# Altium PCB PCB1.PcbDoc
Units mm, origin at the board's own origin, x right, y up, seen from the top; angles counter-clockwise.
Board outline 95.5 x 98.5 mm, 2 copper layers (Top Layer, Bottom Layer); 16 components, 20 nets, 80 pads, 4 vias.
Unrouted connection lines stored in the file: 1.
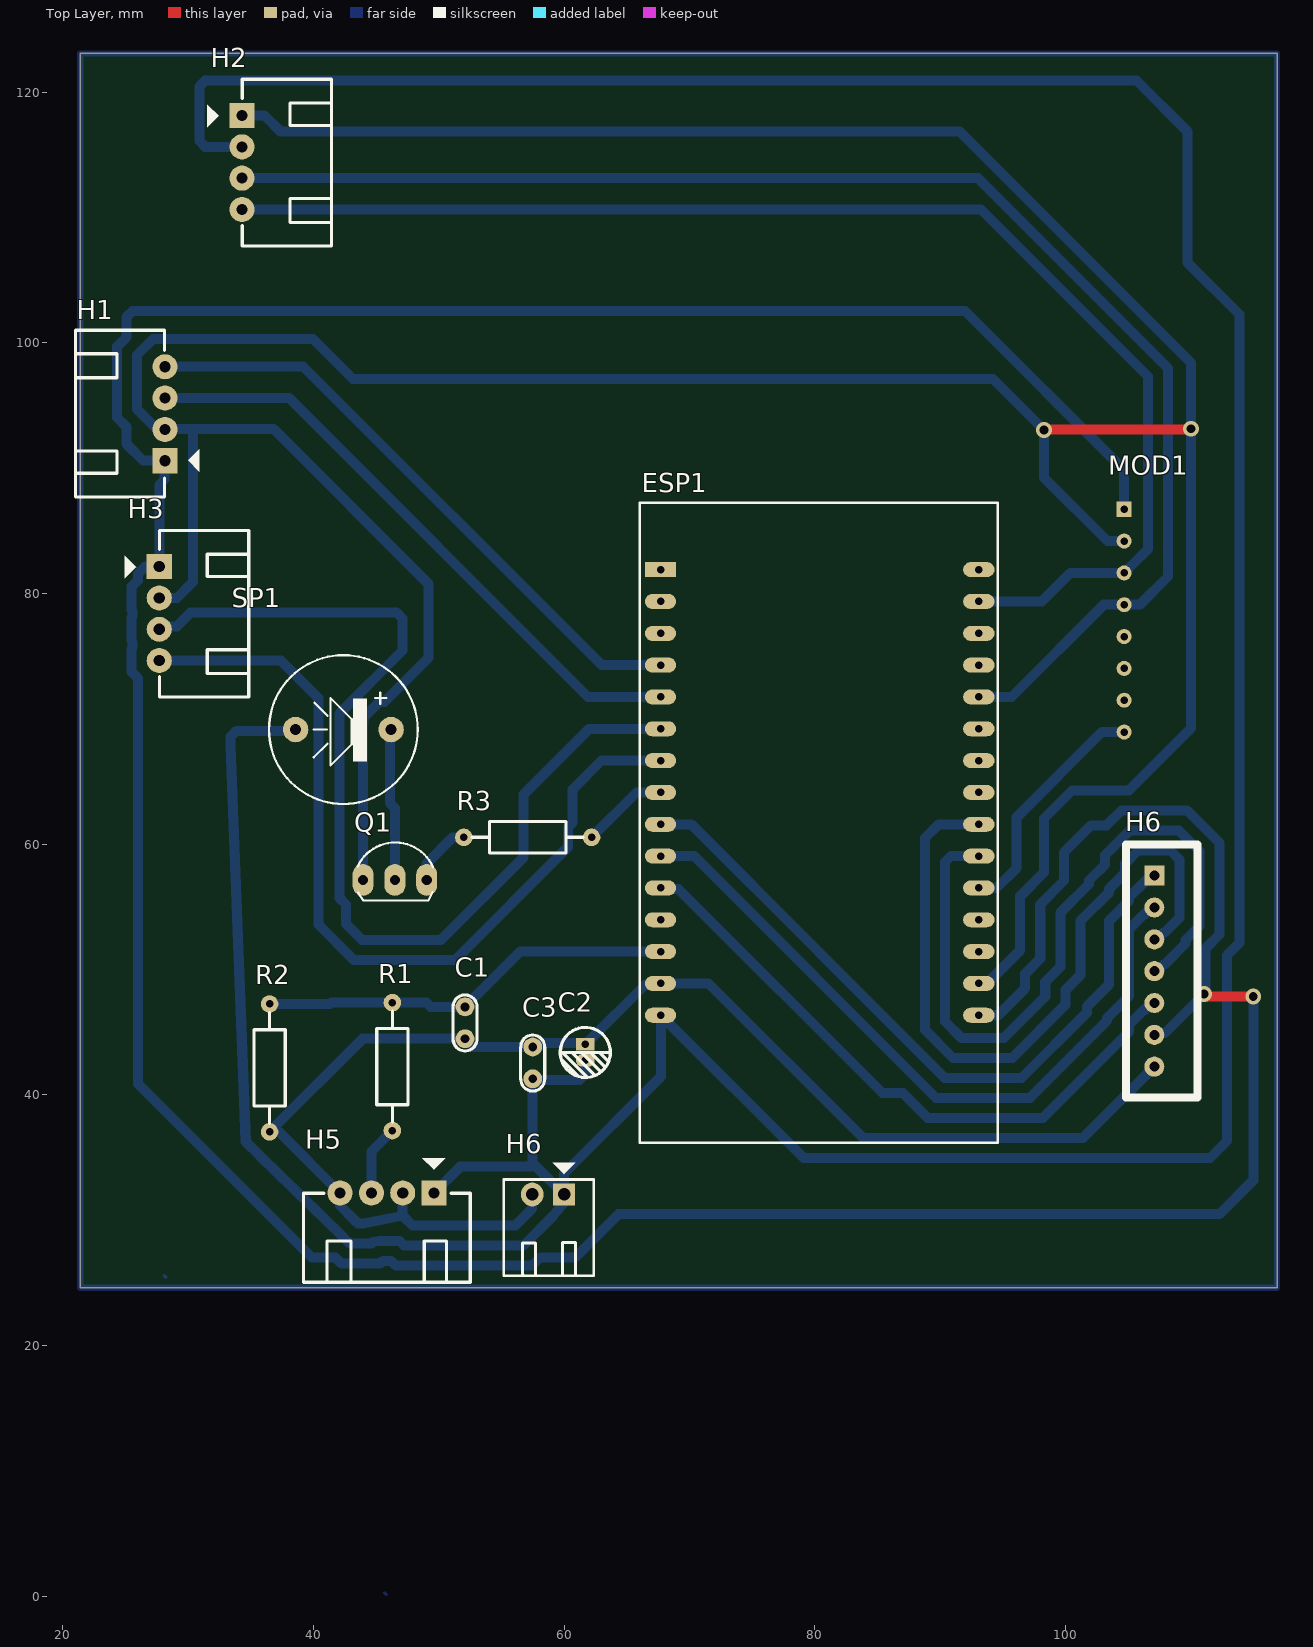
[diagram p0: Top Layer view]
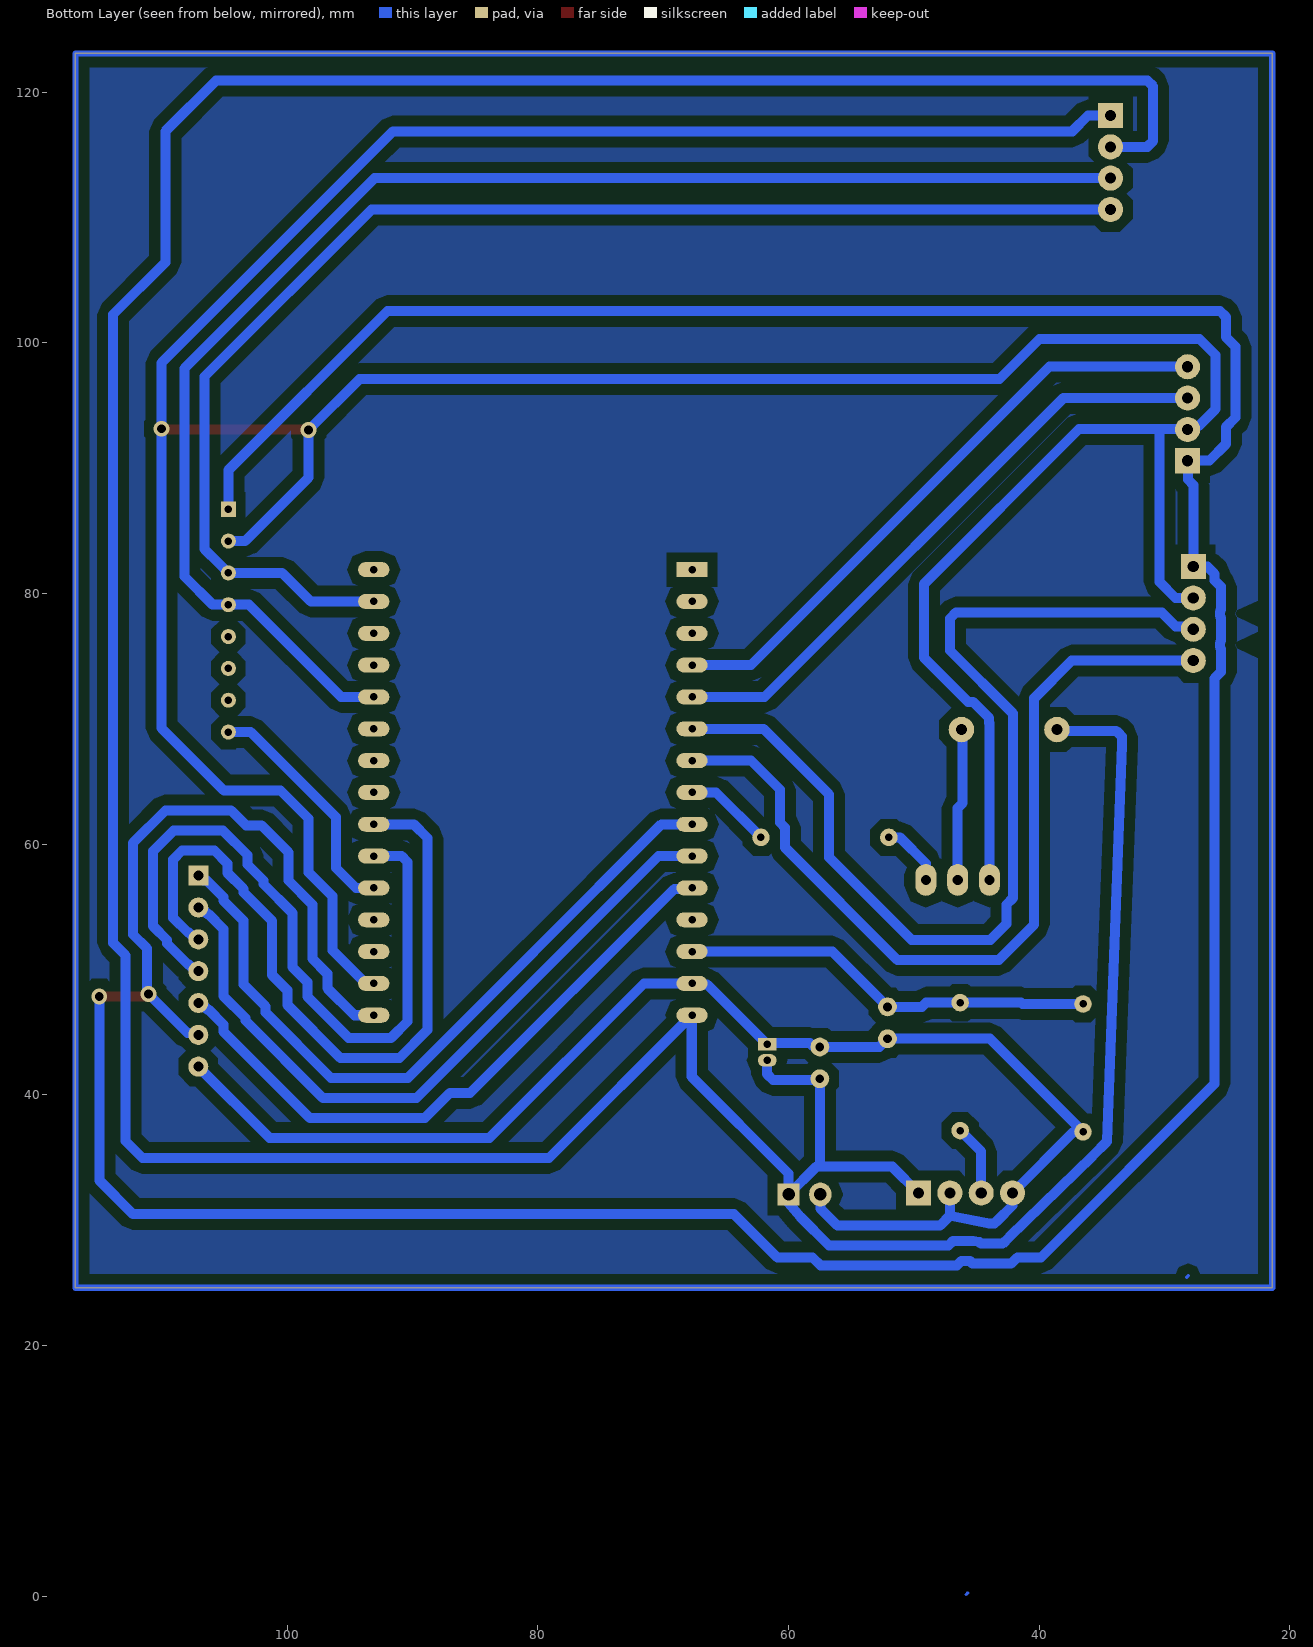
[diagram p1: Bottom Layer view, seen from below]
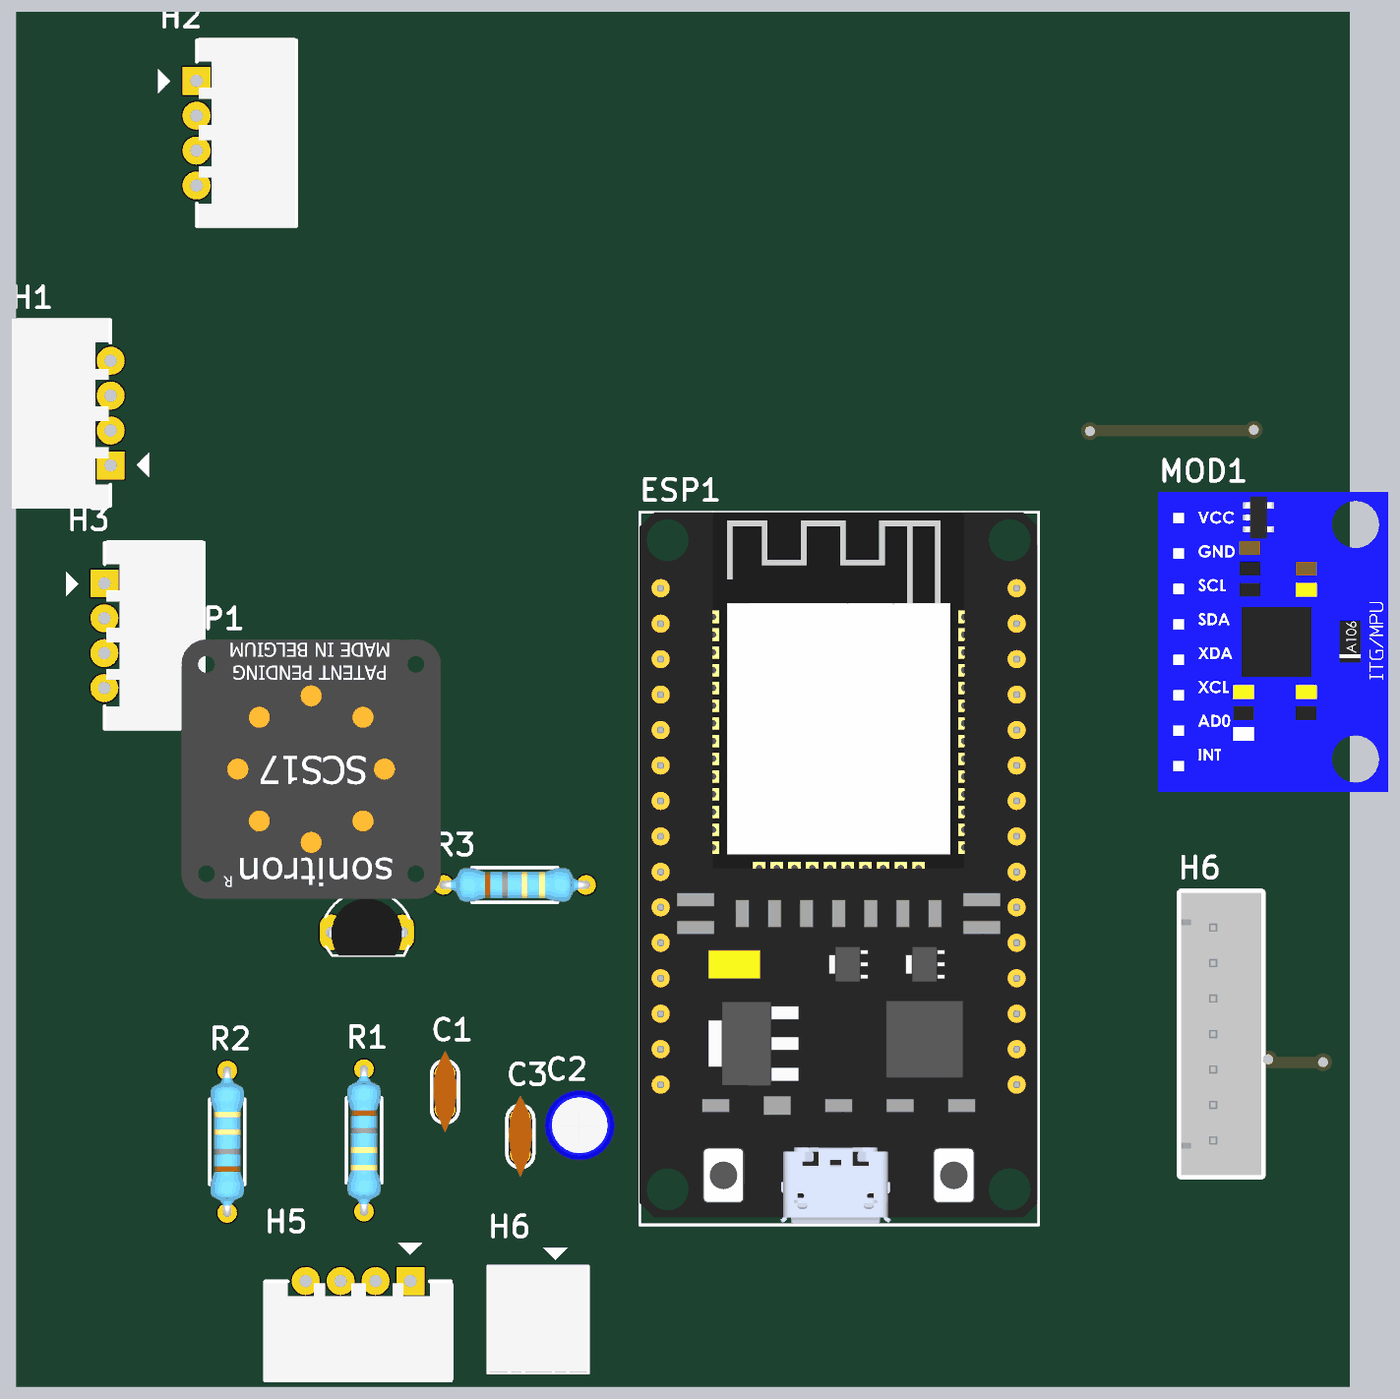
[diagram p2: 3D render of the assembled board from above, using the file's embedded part models]

## Layer stack, top to bottom
Top Solder: solder mask 0.0102, Solder Resist, Dk 3.5
Top Layer: signal copper 0.0356
Dielectric 1: dielectric 0.32, FR-4, Dk 4.8
Bottom Layer: signal copper 0.0356
Bottom Solder: solder mask 0.0102, Solder Resist, Dk 3.5

## Board outline
21.4,24.6 21.4,123.1 116.9,123.1 116.9,24.6

## Design rules (kind name [scope] priority, off if disabled: settings)
Clearance [All] p1: gap=0.8 ignorepadtopadclearanceinfootprint=FALSE
PolygonConnect [All] p1: connectstyle=Relief reliefconductorwidth=0.254 reliefentries=4 polygonreliefangle="90 Angle" airgapwidth=0.254
RoutingVias [All] p1: holewidth=0.711 width=1.27 viastyle="Through Hole" minholewidth=0.711 minwidth=1.27 maxholewidth=0.711 maxwidth=1.27
SolderMaskExpansion [All] p1: expansion=0.102 istentingtop=FALSE
Width [All] p1: maxlimit=1 minlimit=0.6 preferedwidth=0.8
30 further rules are at their usual default settings.

## Classes and differential pairs
component class "Sheet2 (1)": C1 C2 C3 ESP1 H1 H2 H3 H5 H6 MOD1 Q1 R1 R2 R3 SP1

## Components (designator, comment, footprint, x,y, rotation, side; value= is the part's Value field where it differs from the comment)
C1 "104" "tu gom" 52.1,45.751 r90 top
C2 "22uF" "tu hoa 4mm" 61.7,43.386 r270 top
C3 "104" "tu gom" 57.5,42.551 r90 top
ESP1 "ESP32 DEVKIT" "ESP32 WROOM 32 KIT" 67.7,81.911 r0 top
H1 "Soil Moisture" "Header 4P DC 2.54" 28.125,90.626 r180 top
H2 "LCD 16x2" "Header 4P DC 2.54" 34.325,118.126 r0 top
H3 "Rain Sensor" "Header 4P DC 2.54" 27.725,82.126 r0 top
H5 "DK_Nguon" "Header 4P DC 2.54" 49.6,32.151 r270 top
H6 "LoRa Module" XH2.54M-7 107.1,57.491 r270 top
H6 "Nguồn" "Header 2P DC 2.54" 60,32.051 r270 top
MOD1 "MOD MPU_6050" "MOD MPU-6050" 104.7,86.731 r270 top
Q1 "C1815" TO92 46.5,57.151 r0 top value=C9014
R1 "100k" "tro vach 1/4w" 46.3,42.251 r90 top
R2 "100k" "tro vach 1/4w" 36.5,42.151 r270 top
R3 "330R" "tro vach 1/4w" 57.1,60.551 r180 top
SP1 "Speaker" SPK 46.2,69.151 r180 top value="Speaker Chip"

## Footprints (in the part's own frame and the unit in brackets; to place one, negate y for a bottom-side part, rotate by r counter-clockwise, add the part's x,y. Pads: shape width x height; smd on the part's side, far side on the other; paste and mask are expansions set on the pad)
"ESP32 WROOM 32 KIT" [mm]
  rect 2.5x1.2 hole 0.6: 1(0,0)
  oval 2.5x1.2 hole 0.6: 2(0,-2.54) 3(0,-5.08) 4(0,-7.62) 5(0,-10.16) 6(0,-12.7) 7(0,-15.24) 8(0,-17.78) 9(0,-20.32) 10(0,-22.86) 11(0,-25.4) 12(0,-27.94) 13(0,-30.48) 14(0,-33.02) 15(0,-35.56) 16(25.4,-35.56) 17(25.4,-33.02) 18(25.4,-30.48) 19(25.4,-27.94) 20(25.4,-25.4) 21(25.4,-22.86) 22(25.4,-20.32) 23(25.4,-17.78) 24(25.4,-15.24) 25(25.4,-12.7) 26(25.4,-10.16) 27(25.4,-7.62) 28(25.4,-5.08) 29(25.4,-2.54) 30(25.4,0)
  silkscreen extent -1.65,-45.72 26.92,5.33, body extent -1.65,-45.6 26.85,5.33, height 10.49
"Header 2P DC 2.54" [mil]
  rect 70x70 hole 39.37 unplated: 1(0,0)
  oval 75x70 hole 39.37 unplated: 2(0,-100)
  silkscreen extent -100,-190 255,93, body extent -50,-190 250,90, height 237
"Header 4P DC 2.54" [mil]
  rect 78.74x78.74 hole 35: 1(-1,1)
  round 78.74 hole 35: 2(-1,-97.42) 3(-1,-195.85) 4(-1,-294.27)
  silkscreen extent -110,-409 280,115, body extent 5,-413 278,123, height 290
"MOD MPU-6050" [mm]
  rect 1.2x1.2 hole 0.6: 0(0,0)
  round 1.2 hole 0.6: 1(2.54,0) 2(5.08,0) 3(7.62,0) 4(10.16,0) 5(12.7,0) 6(15.24,0) 7(17.78,0)
  body extent -1.99,-1.52 19.51,14.98, height 11.03
SPK [mil] "Speaker Chip"
  round 80 hole 35: 1(0,0) 2(300,0)
  silkscreen extent -84,-234 384,234, body extent -221,-354 511,378, height 344
TO92 [mil] "TO-92"
  oval 66x100 hole 32: 1(-100,0) 2(0,0) 3(100,0)
  silkscreen extent -117,-65 120,118, body extent -109,-66 109,95, height 245
"tro vach 1/4w" [mm]
  round 1.4 hole 0.6: 1(-5.1,0) 2(5.1,0)
  silkscreen extent -4.39,-1.25 4.42,1.25, body extent -5.38,-1.2 5.38,1.2, height 2.41
"tu gom" [mm] "Tu gom mini"
  round 1.5 hole 0.7: 1(-1.27,0) 2(1.27,0)
  silkscreen extent -2.25,-0.97 2.22,0.97, body extent -2.92,-0.85 2.92,0.85, height 6.12
"tu hoa 4mm" [mm]
  rect 1x1.5 hole 0.6: 1(-0.635,0)
  oval 1x1.5 hole 0.6: 2(0.635,0)
  silkscreen extent -2,-2 2.01,2.01, body extent -2.47,-2.47 2.58,2.58, height 14.81
XH2.54M-7 [mm]
  rect 1.6x1.6 hole 0.8: 1(0,0)
  round 1.6 hole 0.8: 2(2.54,0) 3(5.08,0) 4(7.62,0) 5(10.16,0) 6(12.7,0) 7(15.24,0)
  silkscreen extent -2.48,-2.26 17.72,3.46, body extent -2.48,-2.26 17.72,3.48, height 6.91

## Part data
C1 C3: library part "Tu gom 104 50V", "Cắm", Chung_Loai=Cắm, Don_Vi=Con, Ma_Hang=MH004761, So_Chan=2, Ten_Linh_Kien="Tụ gốm 104 100nF 50V"
C2: library part "Tu Hoa 22uF 16V 4x7", "Cắm", Chung_Loai=Cắm, Don_Vi=Con, Ma_Hang=MH006857, So_Chan=2, Ten_Linh_Kien="Tụ Hóa 22uF 16V"
ESP1: library part "ESP32 WROOM 32 KIT"
H1 H2 H3 H5: library part "Header 4P 2.54 Duc Cong", "Cắm", Chung_Loai=Cắm, Don_Vi=Con, Ma_Hang=MH001310, Ten_Linh_Kien="Header 4P XH2.54-4P Đực Cong"
H6: library part "Header 7P 2.54 Duc Cong", "Cắm", Chung_Loai=Cắm, Don_Vi=Con, Ma_Hang=MH004118, Ten_Linh_Kien="Header 7P XH2.54-7P Đực Cong"
H6: library part "Header 2P 2.54 Duc Cong", "Cắm", Chung_Loai=Cắm, Don_Vi=Con, Ma_Hang=MH002852, Ten_Linh_Kien="Header 2P XH2.54-2P Đực Cong"
Q1: library part "Trans C1815 DIP", "NPN transistor"
R1 R2: library part "Tro Vach 1/4W 5% 100k", "Cắm", Chung_Loai=Cắm, Don_Vi=Con, Ma_Hang=MH007352, So_Chan=2, Ten_Linh_Kien="Trở Vạch 1/4w 5% 100k"
R3: library part "Tro Vach 1/4W 1% 330R", "Cắm", Chung_Loai=Cắm, Don_Vi=Con, Ma_Hang=MH006348, So_Chan=2, Ten_Linh_Kien="Trở Vạch 1/4w 1% 330R"
SP1: library part SPK, "Speaker Chip"

## Via types
v1: diameter 1.27/1.27 (per signal layer), hole 0.711, Top Layer to Bottom Layer, tented both sides, 4 vias

## Nets (pads, with @x,y where several pads share a name; then routed paths per layer and width w, separated by ;. In a path a pad name is that pad's centre, name@x,y a point inside that pad or via, vN(x,y) a via of type N, cw(c..) or ccw(c..) an arc to the next point about the centre after c; other vN are vias at no path point)
+5: C2.2 C3.1 ESP1.15 H2.2 H5.1 H6.1@60,32.051 SP1.2 | length 333.1
  Bottom Layer w0.8: H2.2 31.369,115.651 30.9,116.12 30.9,120.482 31.369,120.951 105.675,120.951 109.735,116.891 109.735,106.426 113.9,102.261 113.9,52.134 112.9,51.134 112.9,36.308 111.543,34.951 79.123,34.951 ESP1.15@67.723,46.351 ; SP1.2@38.768,69.051 33.851,69.051 33.617,68.817 33.382,68.582 33.382,67.92 34.6,36.264 35.713,35.151 42.41,28.626 42.91,28.126 44.645,28.126 44.771,28.251 45.283,28.353 46.861,28.353 47.236,27.978 56.772,27.978 59.06,30.266 60,31.388 H6.1@60,32.051 ; H5.1 51.714,34.265 57.5,34.265 ; C2.2 61.7,41.651 61.231,41.182 57.599,41.182 C3.1 57.5,34.265 ; ESP1.15 ESP1.15@67.723,46.351 ; 57.5,34.265 57.786,34.265 H6.1@60,32.051 ; H6.1@60,32.051 60,33.73 67.723,41.453 ESP1.15@67.723,46.351
BAT_ADC: C1.2 ESP1.13 R1.2 R2.1 | length 33.2
  Bottom Layer w0.8: R2.1 41.332,47.251 41.432,47.351 R1.2 49.029,47.351 49.359,47.021 C1.2 56.51,51.431 ESP1.13
BAT_V: H5.3 R1.1 | length 5.7
  Bottom Layer w0.8: H5.3 44.625,35.476 R1.1
BUZZER_CTRL: ESP1.8 R3.1 | length 7
  Bottom Layer w0.8: R3.1 65.78,64.131 ESP1.8
GND: C1.1 C2.1 C3.2 ESP1.14 ESP1.17 H1.2 H2.1 H3.2 H5.2 H5.4 H6.2@57.46,32.051 H6.7 MOD1.1 Q1.1 R2.2 | length 430.5
  Top Layer w0.8: v1(98.3,93.051) 98.35,93.101 109.985,93.101 v1(110.035,93.151)
  Bottom Layer w0.8: H3.2 29.111,79.651 30.4,80.94 30.4,93.126 ; H2.1 36.1,118.151 37.36,116.891 91.56,116.891 110.035,98.416 v1(110.035,93.151) ; Q1.1 43.96,69.658 43.984,69.682 43.984,70.069 45.282,71.367 45.669,71.367 49.2,74.898 49.2,80.753 36.828,93.126 30.4,93.126 ; H5.2 47.125,30.351 ; H6.2@57.46,32.051 57.46,30.929 56.109,29.578 47.899,29.578 47.125,30.351 ; ESP1.17 93.228,49.019 93.883,49.019 96.4,51.535 96.4,55.853 98.305,57.758 98.305,62.052 100.543,64.291 105.064,64.291 110.035,69.262 110.035,92.934 v1@109.818,93.151 ; MOD1.1 103.36,84.191 98.3,89.251 v1(98.3,93.051) 94.221,97.13 43.161,97.13 39.965,100.326 27.214,100.326 25.925,99.037 25.925,94.714 27.285,93.355 27.896,93.355 28.125,93.126 30.4,93.126 ; H6.7 101.4,36.551 83.873,36.551 71.533,48.891 ESP1.14 67.624,48.814 66.493,48.814 62.05,44.371 62.05,44.121 58.295,44.121 58.129,43.955 57.634,43.955 C3.2 52.76,43.821 C1.1 43.93,44.481 R2.2 37.251,37.051 H5.4 42.125,31.173 43.338,29.96 43.572,29.726 43.904,29.726 43.982,29.726 47.125,30.351
LORA_AUX: ESP1.11 H6.5 | length 51.1
  Bottom Layer w0.8: ESP1.11 67.777,56.434 69.117,56.434 85.408,40.143 87.028,40.143 89.02,38.151 98.2,38.151 105.1,45.051 105.1,45.619 106.272,46.791 106.344,46.791 106.884,47.331 H6.5
LORA_M0: ESP1.9 H6.1@107.1,57.491 | length 57.9
  Bottom Layer w0.8: ESP1.9 70.15,61.591 80.265,51.477 80.265,51.465 90.379,41.351 96.503,41.351 101.743,46.591 101.743,47.065 103.5,48.822 103.5,53.902 105.1,55.502 105.1,55.779 106.412,57.091 106.7,57.091 H6.1@107.1,57.491
LORA_M1: ESP1.10 H6.2@107.1,54.951 | length 56.9
  Bottom Layer w0.8: ESP1.10 70.383,59.051 89.683,39.751 97.165,39.751 103.343,45.929 103.343,46.125 105.1,47.882 105.1,53.239 106.272,54.411 106.344,54.411 106.884,54.951 H6.2@107.1,54.951
LORA_RX: ESP1.22 H6.3 | length 59.6
  Bottom Layer w0.8: ESP1.22 89.902,61.591 88.8,60.489 88.8,45.193 91.042,42.951 95.768,42.951 100,47.183 100,48.347 101.2,49.547 101.2,53.865 103.5,56.165 103.5,56.442 104.781,57.724 104.781,58.469 105.803,59.491 108.397,59.491 109.1,58.788 109.1,54.123 107.928,52.951 107.856,52.951 107.316,52.411 H6.3
LORA_TX: ESP1.21 H6.4 | length 59
  Bottom Layer w0.8: ESP1.21 90.869,59.051 90.4,58.582 90.4,45.855 91.704,44.551 95.106,44.551 98.4,47.845 98.4,49.01 99.6,50.21 99.6,54.528 101.9,56.828 101.9,57.105 103.181,58.386 103.181,59.132 105.14,61.091 109.06,61.091 110.7,59.451 110.7,53.46 109.6,52.36 109.6,52.083 107.928,50.411 107.856,50.411 107.316,49.871 H6.4
MPU_INT: ESP1.20 MOD1.7 | length 19.1
  Bottom Layer w0.8: ESP1.20 94.52,56.511 96.12,58.111 96.12,62.154 102.917,68.951 MOD1.7
NetQ1_2: Q1.2 SP1.1 | length 12
  Bottom Layer w0.8: SP1.1@46.1,69.031 46.1,63.291 46.5,62.891 Q1.2
NetQ1_3: Q1.3 R3.2 | length 5.1
  Bottom Layer w0.8: Q1.3 49.04,58.471 51.12,60.551 R3.2
OLED_SCL: ESP1.29 H2.4 MOD1.2 | length 106.8
  Bottom Layer w0.8: H2.4 93.267,110.651 106.6,97.318 106.6,83.545 105.446,82.391 105.44,82.391 MOD1.2 100.403,81.651 98.123,79.371 ESP1.29
OLED_SDA: ESP1.26 H2.3 MOD1.3 | length 115.9
  Bottom Layer w0.8: H2.3 93.03,113.151 108.2,97.981 108.2,81.361 105.95,79.111 MOD1.3 103.06,79.111 95.7,71.751 ESP1.26
RAIN_AO: ESP1.7 H3.4 | length 69.5
  Bottom Layer w0.8: H3.4 37.4,74.651 40.396,71.655 40.396,53.596 43.223,50.769 51.318,50.769 60.3,59.751 60.3,61.338 60.687,61.725 60.687,64.36 62.999,66.671 ESP1.7
RAIN_DO: ESP1.6 H3.3 | length 82.4
  Bottom Layer w0.8: H3.3 27.93,77.381 29.104,77.381 30.209,78.486 46.649,78.486 47.118,78.018 47.118,75.465 42.1,70.448 42.1,55.697 42.6,55.197 42.6,53.654 43.886,52.369 50.184,52.369 56.776,58.96 56.776,63.983 62.004,69.211 ESP1.6
SOIL_AO: ESP1.5 H1.3 | length 49.5
  Bottom Layer w0.8: H1.3@28.125,95.626 38.042,95.626 61.917,71.751 ESP1.5
SOIL_DO: ESP1.4 H1.4 | length 49.4
  Bottom Layer w0.8: H1.4@28.125,98.126 39.167,98.126 63.002,74.291 ESP1.4
VCC: ESP1.16 H1.1 H3.1 H6.6 MOD1.0 | length 320.5
  Top Layer w0.8: v1(111.065,48.051) 111.192,48.051 111.392,47.851 v1(115,47.851)
  Bottom Layer w0.8: ESP1.16 94.643,46.351 96.8,48.508 96.8,49.673 98,50.873 98,55.19 99.905,57.095 99.905,59.356 102.055,61.506 103.292,61.506 104.477,62.691 109.723,62.691 112.3,60.114 112.3,52.797 111.2,51.697 111.2,48.051 v1@111.132,47.983 ; MOD1.0 104.7,89.851 92,102.551 25.57,102.551 25.102,102.082 25.102,100.476 24.325,99.7 24.325,94.052 25.102,93.275 25.102,91.923 26.399,90.626 28.125,90.626 28.125,89.097 27.7,88.672 H3.1 26.575,82.151 26,81.576 26,81.062 25.5,80.562 25.5,78.74 cw(c24.775,78.401) 25.5,78.062 25.5,76.24 cw(c24.775,75.901) 25.5,75.562 25.5,73.74 26,73.24 26,40.885 39.859,27.026 41.747,27.026 42.247,26.526 45.308,26.526 45.535,26.753 46.198,26.753 46.573,26.378 57.434,26.378 58.082,27.026 60.89,27.026 64.345,30.48 112.3,30.48 115,33.18 v1(115,47.851) ; H6.6 107.253,44.944 107.958,44.944 v1(111.065,48.051)
pads on no net: ESP1.1 ESP1.2 ESP1.3 ESP1.12 ESP1.18 ESP1.19 ESP1.23 ESP1.24 ESP1.25 ESP1.27 ESP1.28 ESP1.30 MOD1.4 MOD1.5 MOD1.6
copper on no net: | length 388.4
  Bottom Layer w0.254: 28.1,25.578 28.227,25.451 ; 45.7,0.254 45.827,0.127
  Bottom Layer w0.5: 21.4,24.6 116.9,24.6 116.9,123.1 21.4,123.1 21.4,24.6

## Polygon pours and split planes (outlines as drawn)
no net on Bottom Layer "NONET_L02_P000" (solid, pour order 0): 21.4,24.6 21.4,26.4 21.4,123.1 115.9,123.1 116.9,122.1 116.9,24